# EAGLE board adaptador_scart_v1_panelizado (EAGLE 7.2.0)
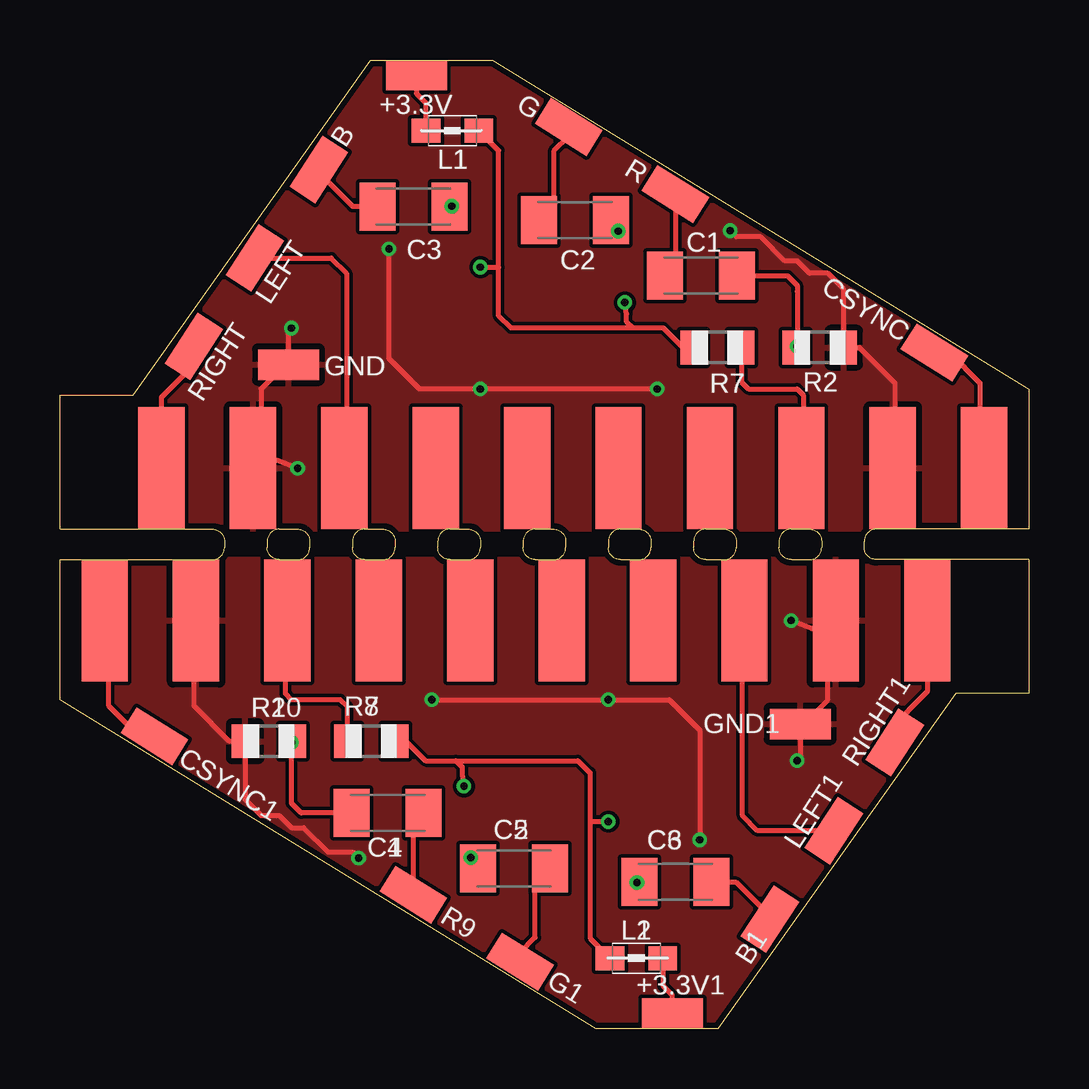
[diagram p0: board, top side]
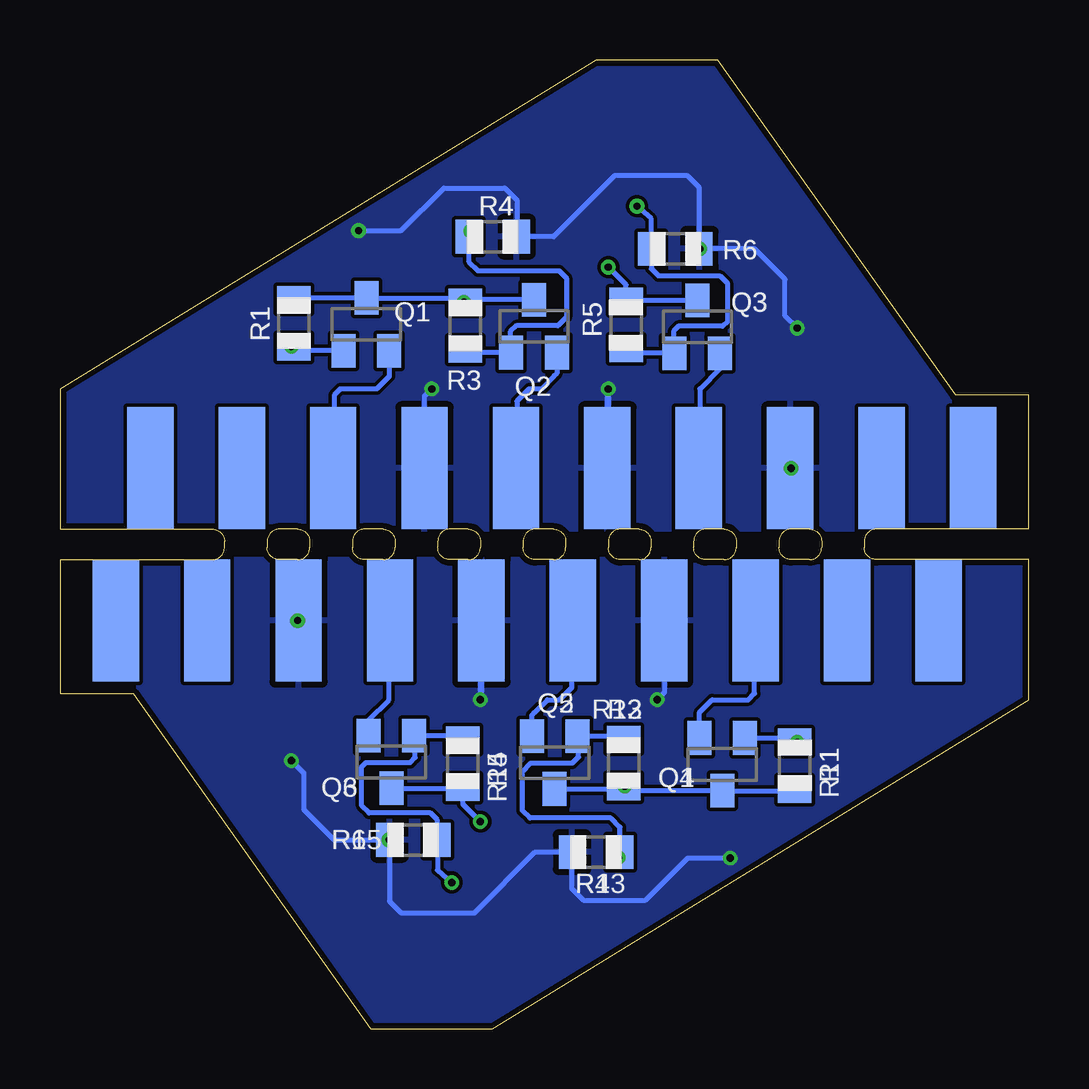
[diagram p1: board, bottom side, seen from below]

Size 40.39 x 40.39 mm. Coordinates in mm from the lower left corner, seen from the top.
Outline: 0,20.83 0,26.42 3.05,26.42 12.95,40.39 18.03,40.39 40.39,26.67 40.39,20.83 34.04,20.83 arc90 33.53,20.32 33.53,20.07 arc90 34.04,19.56 40.39,19.56 40.39,13.97 37.34,13.97 27.43,0 22.35,0 0,13.72 0,19.56 6.35,19.56 arc90 6.86,20.07 6.86,20.32 arc90 6.35,20.83 0,20.83
Outline: 12.7,20.83 13.46,20.83 arc-90 13.97,20.32 13.97,20.07 arc-90 13.46,19.56 12.7,19.56 arc-90 12.19,20.07 12.19,20.32 arc-90 12.7,20.83
Outline: 16.26,20.83 17.02,20.83 arc-90 17.53,20.32 17.53,20.07 arc-90 17.02,19.56 16.26,19.56 arc-90 15.75,20.07 15.75,20.32 arc-90 16.26,20.83
Outline: 19.81,20.83 20.57,20.83 arc-90 21.08,20.32 21.08,20.07 arc-90 20.57,19.56 19.81,19.56 arc-90 19.3,20.07 19.3,20.32 arc-90 19.81,20.83
Outline: 23.37,20.83 24.13,20.83 arc-90 24.64,20.32 24.64,20.07 arc-90 24.13,19.56 23.37,19.56 arc-90 22.86,20.07 22.86,20.32 arc-90 23.37,20.83
Outline: 26.92,20.83 27.69,20.83 arc-90 28.19,20.32 28.19,20.07 arc-90 27.69,19.56 26.92,19.56 arc-90 26.42,20.07 26.42,20.32 arc-90 26.92,20.83
Outline: 9.14,20.83 9.91,20.83 arc-90 10.41,20.32 10.41,20.07 arc-90 9.91,19.56 9.14,19.56 arc-90 8.64,20.07 8.64,20.32 arc-90 9.14,20.83
Outline: 30.48,20.83 31.24,20.83 arc-90 31.75,20.32 31.75,20.07 arc-90 31.24,19.56 30.48,19.56 arc-90 29.97,20.07 29.97,20.32 arc-90 30.48,20.83
Copper layers (1*16): Top 0.035mm / dielectric 1.5mm / Bottom 0.035mm
Design rules "seedstudio_Fusion_eagle_rule_v1.1": minimum track width 6mil, minimum drill 12mil, track to track 6mil, track to pad 6mil, pad to pad 6mil, via to via 6mil, smd to smd 0mil, copper to edge 10mil, drill to drill 10mil, minimum pad ring 10mil, minimum via ring 6mil, stop-mask expansion 2mil, vias tented up to drill 100mil, thermal gap 10mil

## Footprints (pad centres in the part's own frame; a part is rotated, then mirrored left to right if it is on the bottom)
SMD1,27-2,54 = smd 1.27 x 2.54: 1 0,0
C1206K = smd 1.5 x 2: 1 -1.5,0; 2 1.5,0
0805 = smd 1.2 x 1: 1 -1.1,0; 2 1.1,0
SOT23 = smd 1 x 1.4: 1 -0.95,-1.1; 2 0.95,-1.1; 3 0,1.1
R0805 = smd 1.1 x 1.4: 1 -1,0; 2 1,0
SCART-PCB = smd 1.93 x 5.08: 1 17.145,0; 3 13.335,0; 5 9.525,0; 7 5.715,0; 9 1.905,0; 11 -1.905,0; 13 -5.715,0; 15 -9.525,0; 17 -13.335,0; 19 -17.145,0 | smd 1.93 x 5.08 bottom: 2 15.24,0; 4 11.43,0; 6 7.62,0; 8 3.81,0; 10 0,0; 12 -3.81,0; 14 -7.62,0; 16 -11.43,0; 18 -15.24,0; 20 -19.05,0

## Placement (x,y rotation side)
+3.3V  [SMD1,27-2,54]  14.86,39.75 90 top
+3.3V1  [SMD1,27-2,54]  25.53,0.63 270 top
B  [SMD1,27-2,54]  10.79,35.81 147 top
B1  [SMD1,27-2,54]  29.59,4.57 327 top
C1  1uF  [C1206K]  26.72,31.39 0 top
C2  1uF  [C1206K]  21.46,33.71 0 top
C3  1uF  [C1206K]  14.73,34.26 0 top
C4  1uF  [C1206K]  13.67,8.99 180 top
C5  1uF  [C1206K]  18.92,6.68 180 top
C6  1uF  [C1206K]  25.65,6.12 180 top
CSYNC  [SMD1,27-2,54]  36.45,28.19 58 top
CSYNC1  [SMD1,27-2,54]  3.94,12.19 238 top
G  [SMD1,27-2,54]  21.21,37.59 58 top
G1  [SMD1,27-2,54]  19.18,2.79 238 top
GND  [SMD1,27-2,54]  9.53,27.69 90 top
GND1  [SMD1,27-2,54]  30.86,12.7 270 top
L1  [0805]  16.36,37.44 0 top
L2  [0805]  24.03,2.95 180 top
LEFT  [SMD1,27-2,54]  8.13,32.13 147 top
LEFT1  [SMD1,27-2,54]  32.26,8.25 327 top
Q1  BC847C  [SOT23]  27.61,29.36 0 bottom
Q2  BC847C  [SOT23]  20.62,29.29 0 bottom
Q3  BC847C  [SOT23]  13.82,29.26 0 bottom
Q4  BC847C  [SOT23]  12.78,11.02 180 bottom
Q5  BC847C  [SOT23]  19.76,11.1 180 bottom
Q6  BC847C  [SOT23]  26.57,11.13 180 bottom
R  [SMD1,27-2,54]  25.65,34.8 58 top
R1  10K  [R0805]  30.63,29.41 90 bottom
R2  22K  [R0805]  31.67,28.4 180 top
R3  10K  [R0805]  23.5,29.31 90 bottom
R4  22K  [R0805]  22.35,33.02 180 bottom
R5  10K  [R0805]  16.79,29.34 90 bottom
R6  22K  [R0805]  14.73,32.51 180 bottom
R7  50  [R0805]  27.41,28.4 180 top
R8  50  [R0805]  12.98,11.99 0 top
R9  [SMD1,27-2,54]  14.73,5.59 238 top
R10  22K  [R0805]  8.71,11.99 0 top
R11  10K  [R0805]  9.75,10.97 270 bottom
R12  10K  [R0805]  16.89,11.07 270 bottom
R13  22K  [R0805]  18.03,7.37 0 bottom
R14  10K  [R0805]  23.6,11.05 270 bottom
R15  22K  [R0805]  25.65,7.87 0 bottom
RIGHT  [SMD1,27-2,54]  5.59,28.45 147 top
RIGHT1  [SMD1,27-2,54]  34.8,11.94 327 top
U$1  SCART-MALE-PCB  [SCART-PCB]  19.47,23.37 0 bottom
U$2  SCART-MALE-PCB  [SCART-PCB]  20.91,17.02 180 bottom

## Library data of the parts
+3.3V +3.3V1 B B1 CSYNC CSYNC1 G G1 GND GND1 LEFT LEFT1 R R9 RIGHT RIGHT1 = wirepad
C1-C6 = rcl
L1 L2 = wuerth-elektronik
Q1-Q6 = transistor-npn
R1-R8 R10-R15 = adafruit
U$1 U$2 = con-hirschmann

## Nets
BIN: B.1 C3.1
BIN1: B1.1 C6.1
BOUT: Q3.2 U$1.7
BOUT1: Q6.2 U$2.7
CSYNC: CSYNC.1 U$1.20
CSYNC1: CSYNC1.1 U$2.20
FS: R7.1 U$1.16
FS1: R8.1 U$2.16
GIN: C2.1 G.1
GIN1: C5.1 G1.1
GND: GND.1 R2.1 R4.1 R6.1 U$1.4 U$1.5 U$1.9 U$1.13 U$1.18
GND1: GND1.1 R10.1 R13.1 R15.1 U$2.4 U$2.5 U$2.9 U$2.13 U$2.18
GOUT: Q2.2 U$1.11
GOUT1: Q5.2 U$2.11
LEFT: LEFT.1 U$1.6
LEFT1: LEFT1.1 U$2.6
N$1: C4.2 Q4.1 R10.2 R11.1
N$2: C6.2 Q6.1 R14.1 R15.2
N$3: C5.2 Q5.1 R12.1 R13.2
N$4: C1.2 Q1.1 R1.1 R2.2
N$8: C3.2 Q3.1 R5.1 R6.2
N$11: C2.2 Q2.1 R3.1 R4.2
RIGHT: RIGHT.1 U$1.2
RIGHT1: RIGHT1.1 U$2.2
RIN: C1.1 R.1
RIN1: C4.1 R9.1
ROUT: Q1.2 U$1.15
ROUT1: Q4.2 U$2.15
VCC: L1.2 Q1.3 Q2.3 Q3.3 R1.2 R3.2 R5.2 R7.2
VCC1: L2.2 Q4.3 Q5.3 Q6.3 R8.2 R11.2 R12.2 R14.2
VCCIN: +3.3V.1 L1.1
VCCIN1: +3.3V1.1 L2.1

## Tracks (layer width: path | path; a pad name or v marks a point on that pad's centre or on a via)
BIN
  Top 0.203: B.1 10.79,35.69 12.19,34.29 13.71,34.29 C3.1
BIN1
  Top 0.203: B1.1 29.59,4.7 28.19,6.1 26.68,6.1 C6.1
BOUT
  Bottom 0.203: Q3.2 12.87,27.52 13.72,26.67 13.72,23.41 U$1.7
BOUT1
  Bottom 0.203: Q6.2 27.52,12.87 26.67,13.72 26.67,16.98 U$2.7
CSYNC
  Top 0.203: CSYNC.1 37.08,28.19 38.35,26.92 38.35,23.54 U$1.20
CSYNC1
  Top 0.203: CSYNC1.1 3.3,12.19 2.03,13.46 2.03,16.85 U$2.20
FS
  Top 0.203: R7.1 28.41,26.96 28.7,26.67 30.73,26.67 30.99,26.42 30.99,23.45 U$1.16
FS1
  Top 0.203: R8.1 11.98,13.42 11.68,13.72 9.65,13.72 9.4,13.97 9.4,16.93 U$2.16
GIN
  Top 0.203: G.1 21.21,37.21 20.57,36.58 20.57,33.82 C2.1
GIN1
  Top 0.203: G1.1 19.18,3.18 19.81,3.81 19.81,6.57 C5.1
GND  (via drill 0.3 pad 0.61)
  Top 0.203: 8.38,23.71 8.38,26.67 9.4,27.69 GND.1 9.53,29.08 v9.65,29.21 | 8.38,23.71 U$1.4 | U$1.18 34.8,23.45 34.8,26.92 33.33,28.4 R2.1 32.67,30.83 32,31.5 31.24,31.5 30.73,32 30.23,32 29.21,33.02 28.19,33.02 v27.94,33.27 | 8.38,23.71 9.06,23.71 v9.91,23.37 | v24.89,26.67 v17.53,26.67 14.99,26.67 13.72,27.94 v13.72,32.51
  Bottom 0.203: v9.65,29.21 10.16,29.72 10.16,31.24 11.43,32.51 R6.1 | R6.1 13.73,35.07 14.22,35.56 17.27,35.56 19.81,33.02 R4.1 21.34,33.04 21.34,34.54 21.84,35.05 24.38,35.05 26.16,33.27 v27.94,33.27 | v9.91,23.37 U$1.5 | U$1.5 | U$1.13 25.19,26.37 v24.89,26.67 | v13.72,32.51 13.72,32.5 R6.1 | v17.53,26.67 17.53,23.41 U$1.9 17.57,26.63 v17.53,26.67
  pour Bottom: 0,20.83 0,26.42 3.05,26.42 12.95,40.39 18.03,40.39 40.39,26.67 40.39,20.83
  pour Top: 0,20.83 40.39,20.83 40.39,26.67 18.03,40.39 12.95,40.39 3.05,26.42 0,26.42
GND1  (via drill 0.3 pad 0.61)
  Top 0.203: 32,16.68 32,13.72 30.99,12.7 GND1.1 30.86,11.3 v30.73,11.18 | 32,16.68 U$2.4 | U$2.18 5.59,16.93 5.59,13.46 7.06,11.99 R10.1 7.71,9.56 8.38,8.89 9.14,8.89 9.65,8.38 10.16,8.38 11.18,7.37 12.19,7.37 v12.45,7.11 | 32,16.68 31.33,16.68 v30.48,17.02 | v15.49,13.72 v22.86,13.72 25.4,13.72 26.67,12.45 v26.67,7.87
  Bottom 0.203: v30.73,11.18 30.23,10.67 30.23,9.14 28.96,7.87 R15.1 | R15.1 26.65,5.32 26.16,4.83 23.11,4.83 20.57,7.37 R13.1 19.05,7.35 19.05,5.84 18.54,5.33 16,5.33 14.22,7.11 v12.45,7.11 | v30.48,17.02 U$2.5 | U$2.5 | U$2.13 15.2,14.01 v15.49,13.72 | v26.67,7.87 26.67,7.89 R15.1 | v22.86,13.72 22.86,16.98 U$2.9 22.82,13.76 v22.86,13.72
  pour Bottom: 40.39,19.56 40.39,13.97 37.34,13.97 27.43,0 22.35,0 0,13.72 0,19.56
  pour Top: 40.39,19.56 0,19.56 0,13.72 22.35,0 27.43,0 37.34,13.97 40.39,13.97
GOUT
  Bottom 0.203: Q2.2 19.68,27.31 19.81,27.18 20.32,26.67 20.83,26.67 21.34,26.16 21.34,23.41 U$1.11
GOUT1
  Bottom 0.203: Q5.2 20.71,13.07 20.57,13.21 20.07,13.72 19.56,13.72 19.05,14.22 19.05,16.98 U$2.11
LEFT
  Top 0.203: LEFT.1 11.3,32.13 11.94,31.5 11.94,23.45 U$1.6
LEFT1
  Top 0.203: LEFT1.1 29.08,8.25 28.45,8.89 28.45,16.93 U$2.6
N$1  (via drill 0.3 pad 0.61)
  Top 0.203: R10.2 9.51,12.19 v9.65,11.94 9.65,9.65 9.65,9.4 10.06,8.99 C4.2
  Bottom 0.203: Q4.1 9.9,12.12 R11.1 9.75,11.84 v9.65,11.94
N$2  (via drill 0.3 pad 0.61)
  Top 0.203: v24.05,6.1 24.64,6.14 C6.2
  Bottom 0.203: R14.1 23.77,12.22 Q6.1 25.58,12.18 25.58,11.3 25.78,11.1 27.64,11.1 27.81,10.92 27.81,9.3 27.51,8.99 24.94,8.99 24.65,8.7 R15.2 24.65,6.62 v24.05,6.1
N$3  (via drill 0.3 pad 0.61)
  Top 0.203: C5.2 17.2,6.68 v17.12,7.14
  Bottom 0.203: R12.1 17.02,12.2 Q5.1 18.77,12.16 18.77,11.33 19.02,11.07 20.75,11.07 21.11,10.72 21.11,9.09 20.8,8.79 17.42,8.79 17.03,8.4 R13.2 17.02,7.35 v17.12,7.14
N$4  (via drill 0.3 pad 0.61)
  Top 0.203: R2.2 30.88,28.19 v30.73,28.45 30.73,30.73 30.73,30.99 30.33,31.39 C1.2
  Bottom 0.203: Q1.1 30.48,28.26 R1.1 30.63,28.55 v30.73,28.45
N$8  (via drill 0.3 pad 0.61)
  Top 0.203: v16.33,34.29 15.75,34.25 C3.2
  Bottom 0.203: R5.1 16.61,28.16 Q3.1 14.81,28.2 14.81,29.08 14.61,29.29 12.75,29.29 12.57,29.46 12.57,31.09 12.88,31.39 15.44,31.39 15.73,31.68 R6.2 15.73,33.77 v16.33,34.29
N$11  (via drill 0.3 pad 0.61)
  Top 0.203: C2.2 23.19,33.71 v23.27,33.25
  Bottom 0.203: R3.1 23.37,28.19 Q2.1 21.61,28.23 21.61,29.06 21.36,29.31 19.63,29.31 19.28,29.67 19.28,31.29 19.58,31.6 22.96,31.6 23.35,31.99 R4.2 23.37,33.04 v23.27,33.25
RIGHT
  Top 0.203: U$1.2 4.23,26.33 5.84,27.94 5.84,28.19 RIGHT.1
RIGHT1
  Top 0.203: U$2.2 36.15,14.05 34.54,12.45 34.54,12.19 RIGHT1.1
RIN
  Top 0.203: R.1 25.65,31.46 C1.1
RIN1
  Top 0.203: R9.1 14.73,8.92 C4.1
ROUT
  Bottom 0.203: Q1.2 26.66,27.19 27.18,26.67 28.7,26.67 28.96,26.42 28.96,23.41 U$1.15
ROUT1
  Bottom 0.203: Q4.2 13.73,13.2 13.21,13.72 11.68,13.72 11.43,13.97 11.43,16.98 U$2.15
VCC  (via drill 0.3 pad 0.61)
  Top 0.203: R7.2 25.96,28.4 25.15,29.21 | 25.15,29.21 18.8,29.21 18.29,29.72 18.29,31.75 | 18.29,31.75 18.29,36.61 L1.2 | v17.53,31.75 18.29,31.75 | 25.15,29.21 23.88,29.21 23.62,29.46 23.62,29.79 v23.55,30.28
  Bottom 0.203: Q3.3 16.77,30.36 R5.2 16.79,31.01 v17.53,31.75 | Q2.3 23.42,30.39 R3.2 | R1.2 30.58,30.46 Q1.3 23.65,30.46 R3.2 | v23.55,30.28 23.65,30.16 R3.2
VCC1  (via drill 0.3 pad 0.61)
  Top 0.203: R8.2 14.43,11.99 15.24,11.18 | 15.24,11.18 21.59,11.18 22.1,10.67 22.1,8.64 | 22.1,8.64 22.1,3.78 L2.2 | v22.86,8.64 22.1,8.64 | 15.24,11.18 16.51,11.18 16.76,10.92 16.76,10.59 v16.84,10.11
  Bottom 0.203: Q6.3 23.62,10.02 R14.2 23.6,9.37 v22.86,8.64 | Q5.3 16.97,10 R12.2 | R11.2 9.8,9.92 Q4.3 16.74,9.92 R12.2 | v16.84,10.11 16.74,10.23 R12.2
VCCIN
  Top 0.203: +3.3V.1 14.86,38.99 15.24,38.61 15.24,37.46 L1.1
VCCIN1
  Top 0.203: +3.3V1.1 25.53,1.4 25.15,1.78 25.15,2.93 L2.1

## Text on the board
_tNames: +3.3V | G | B | L1 | R | LEFT | C1 | C3 | C2 | RIGHT | CSYNC | GND | R7 | R2 | R2 | R7 | GND | CSYNC | RIGHT | C2 | C1 | C3 | LEFT | R | L1 | B | G | +3.3V
_bNames: R4 | R6 | Q3 | Q1 | R5 | R1 | Q2 | R3 | R3 | Q2 | R1 | R5 | Q1 | Q3 | R6 | R4
201bmp: C:/Users/rodriguj/Documents/zxspectrum/zxuno/repositorio/hardware/otros/zxuno2scart/silueta.bmp